# Altium PCB PCB1.PcbDoc
Units mil, origin at the board's own origin, x right, y up, seen from the top; angles counter-clockwise.
Board outline 1377.95 x 629.92 mil, 2 copper layers (Top Layer, Bottom Layer), stack 65.792 mil thick; 2 components, 19 nets, 46 pads, 0 vias.
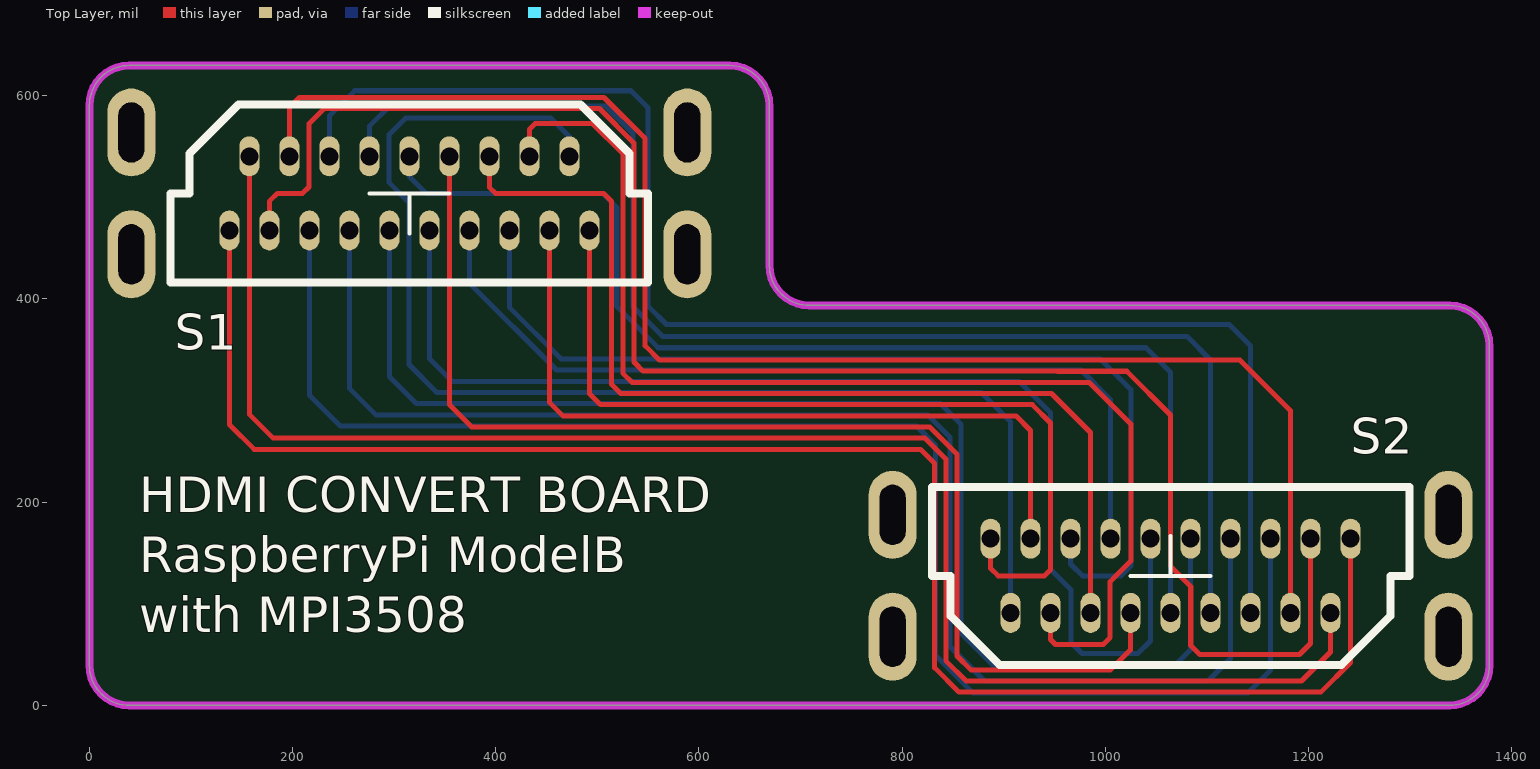
[diagram p0: Top Layer view]
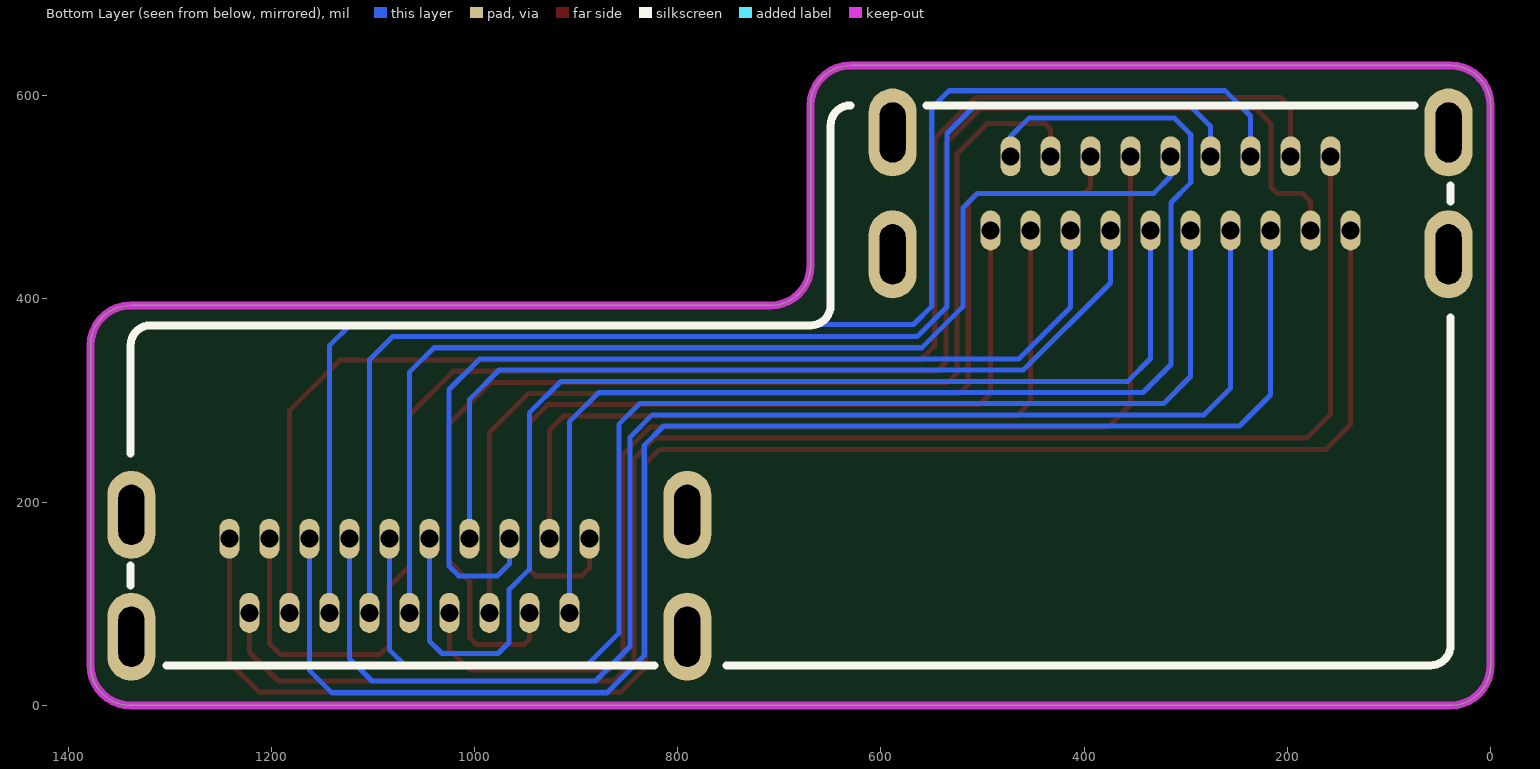
[diagram p1: Bottom Layer view, seen from below]

## Layer stack, top to bottom
Top Layer: signal copper 1.4
Dielectric: core 62.9921, FR-4, Dk 4.8
Bottom Layer: signal copper 1.4

## Board outline
0,39.37 0,590.55 cw(c39.37,590.55) 39.37,629.92 629.92,629.92 cw(c629.92,590.55) 669.29,590.55 669.29,433.07 ccw(c708.66,433.07) 708.66,393.7 1338.58,393.7 cw(c1338.58,354.33) 1377.95,354.33 1377.95,39.37 cw(c1338.58,39.37) 1338.58,0 39.37,0 cw(c39.37,39.37)

## Design rules (kind name [scope] priority, off if disabled: settings)
Clearance [All] p1: gap=6
HoleSize [All] p1: absolutevalues=TRUE maxlimit=100 minlimit=5 maxpercent=80.000 minpercent=20.000
HoleToHoleClearance [All] p1: gap=7.87 allowstackedmicrovias=TRUE
MinimumSolderMaskSliver [All] p1: minsoldermaskwidth=5
PolygonConnect [All] p1: connectstyle=Relief reliefconductorwidth=10 reliefentries=4 polygonreliefangle="90 Angle"
RoutingCorners [All] p1: cornerstyle=Round minsetback=5 maxsetback=100
RoutingPriority [All] p1: routingpriority=1
RoutingTopology [All] p1: topology=Starburst
RoutingVias [All] p1: holewidth=11.81 width=23.62 viastyle="Through Hole" minholewidth=11.81 minwidth=23.62 maxholewidth=59.06 maxwidth=78.74
SilkToSilkClearance [All] p1: silktosilkclearance=5
SilkscreenOverComponentPads [All] p1: minsilkscreentomaskgap=5
SolderMaskExpansion [All] p1: expansion=4
Width [All] p1: maxlimit=10 minlimit=5 preferedwidth=5
20 further rules are at their usual default settings.

## Components (designator, comment, footprint, x,y, rotation, side; value= is the part's Value field where it differs from the comment)
S1 "HDMI" "HDMI PLUG" 314.96,503.94 r0 top locked
S2 "HDMI" "HDMI PLUG" 1064.17,127.56 r180 top locked

## Footprints (in the part's own frame and the unit in brackets; to place one, negate y for a bottom-side part, rotate by r counter-clockwise, add the part's x,y. Pads: shape width x height; smd on the part's side, far side on the other; paste and mask are expansions set on the pad)
"HDMI PLUG" [mm]
  oval 1.2x2.2 hole 0.65 slot 1.5 at 90 deg: 0(-6.949,-1.524) 0(-6.949,1.524) 0(6.949,-1.524) 0(6.949,1.524)
  oval 0.5x1 hole 0.45: 1(4.5,-0.927) 2(4,0.927) 3(3.5,-0.927) 4(3,0.927) 5(2.5,-0.927) 6(2,0.927) 7(1.5,-0.927) 8(1,0.927) 9(0.5,-0.927) 10(0,0.927) 11(-0.5,-0.927) 12(-1,0.927) 13(-1.5,-0.927) 14(-2,0.927) 15(-2.5,-0.927) 16(-3,0.927) 17(-3.5,-0.927) 18(-4,0.927) 19(-4.5,-0.927)
  silkscreen extent -5.97,-2.22 5.97,2.23, body extent -6.95,-2.23 6.95,2.22, height 12.81

## Nets (pads, with @x,y where several pads share a name; then routed paths per layer and width w, separated by ;. In a path a pad name is that pad's centre, name@x,y a point inside that pad or via, vN(x,y) a via of type N, cw(c..) or ccw(c..) an arc to the next point about the centre after c; other vN are vias at no path point)
NetS1_1: S1.1 S2.1 | length 864.6
  Top Layer w5: S1.1@492.13,472.44 S1.1 492.13,306.87 503,296 928.08,296 946.08,278 946.08,133.56 940.08,127.56 894.45,127.56 887.01,135 S2.1@887.01,159.06
NetS1_2: S1.2 S2.2 | length 1249.2
  Bottom Layer w5: S1.2@472.44,535.43 S1.2 472.44,560 454.44,578 311.08,578 295.08,562 295.08,514.51 314.59,495 314.59,335.41 342,308 877.83,308 906.69,279.14 S2.2@906.69,96.06
NetS1_3: S1.3 S2.3 | length 770.8
  Top Layer w5: S1.3@452.76,472.44 S1.3 452.76,298.24 466,285 912,285 926.38,270.62 S2.3 S2.3@926.38,159.06
NetS1_4: S1.4 S2.4 | length 1188.2
  Top Layer w5: S1.4@433.07,535.43 S1.4 433.07,566.93 438.82,572.68 495.32,572.68 525.08,542.92 525.08,326.92 534,318 948.08,318 948.16,317.92 984.08,317.92 1025.08,276.92 1025.08,142.08 1010.08,127.08 1010.08,127 1004.74,121.67 1004.74,66.74 998,60 951,60 946.06,64.94 S2.4 S2.4@946.06,96.06
NetS1_5: S1.5 S2.5 | length 987.5
  Bottom Layer w5: S1.5@413.39,472.44 S1.5 413.39,392 464.39,341 995,341 1025.08,310.92 1025.08,137.08 1015.56,127.56 977.44,127.56 965.75,139.25 S2.5@965.75,159.06
NetS1_6: S1.6 S2.6 | length 995.1
  Top Layer w5: S1.6@393.7,535.43 393.7,510 399.7,504 506,504 514.08,495.92 514.08,315.92 523,307 943.52,307 943.6,306.92 947.08,306.92 985.43,268.57 S2.6@985.43,96.06
NetS1_7: S1.7 S2.7 | length 877.2
  Bottom Layer w5: S1.7@374.02,472.44 S1.7 374.02,415.81 459.83,330 976,330 1005.12,300.88 S2.7 S2.7@1005.12,159.06
NetS1_8: S1.8 S2.8 | length 1183.8
  Top Layer w5: S1.8@354.33,535.43 354.33,296.06 376.39,274 827.11,274 854,247.11 854,48.56 867.56,35 1005,35 1024.8,54.8 S2.8 S2.8@1024.8,96.06
NetS1_9: S1.9 S2.9 | length 1182.6
  Bottom Layer w5: S1.9@334.65,472.44 S1.9 334.65,341.35 357,319 915,319 946.08,287.92 946.08,133.92 966.12,113.88 966.12,61.88 977,51 1032,51 1044.49,63.49 S2.9@1044.49,159.06
NetS1_10: S1.10 S2.10 | length 1137.7
  Bottom Layer w5: S1.10@314.96,535.43 314.96,520.47 331.43,504 505.08,504 519.08,490 519.08,392.92 520,392 520,391.83 559.83,352 1040,352 1064.17,327.83 S2.10
NetS1_11: S1.11 S2.11 | length 1286.5
  Bottom Layer w5: S1.11@295.28,472.44 S1.11 295.28,323.72 322,297 837.65,297 858,276.65 858,71 890,39 1068,39 1083.86,54.86 S2.11@1083.86,159.06
NetS1_12: S1.12 S2.12 | length 1318.2
  Bottom Layer w5: S1.12@275.59,535.43 S1.12 275.59,570 295.59,590 508,590 535,563 535,392.38 564.38,363 1080.54,363 1103.54,340 S2.12@1103.54,96.06
NetS1_13: S1.13 S2.13 | length 1389.7
  Bottom Layer w5: S1.13@255.91,472.44 S1.13 255.91,312.09 282,286 825.02,286 847,264.02 847,58 881,24 1101,24 1123.23,46.23 S2.13@1123.23,159.06
NetS1_14: S1.14 S2.14 | length 1437.8
  Bottom Layer w5: S1.14@236.22,535.43 S1.14 236.22,580 261.22,605 533.07,605 550,588.07 550,392.94 567.94,375 1121.85,375 1142.91,353.94 S2.14@1142.91,96.06
NetS1_15: S1.15 S2.15 | length 1489.3
  Bottom Layer w5: S1.15@216.53,472.44 S1.15 216.53,305.47 247,275 814,275 833,256 833,49 869.56,12.44 1140.44,12.44 1162.6,34.6 S2.15@1162.6,159.06
NetS1_16: S1.16 S2.16 | length 1483.8
  Top Layer w5: S1.16@196.85,535.43 S1.16 196.85,588.58 206.69,598.43 506.56,598.43 547.08,557.9 547.08,353.92 561,340 1132.28,340 1182.28,290 S2.16@1182.28,96.06
NetS1_17: S1.17 S2.17 | length 1695.4
  Top Layer w5: S1.17@177.16,472.44 177.16,496.09 185.08,504 209.84,504 216.16,510.32 216.16,572.46 231.13,587.43 502,587.43 536.08,553.35 536.08,337.92 545,329 952.63,329 952.71,328.92 1021.08,328.92 1064.08,285.92 1064.08,137 1084.08,117 1084.08,58.92 1093,50 1191,50 1201.97,60.97 S2.17@1201.97,159.06
NetS1_18: S1.18 S2.18 | length 1593.4
  Top Layer w5: S1.18@157.48,535.43 157.48,286.52 181,263 822.56,263 843,242.56 843,44 863,24 1193,24 1221.65,52.65 S2.18 S2.18@1221.65,96.06
NetS1_19: S1.19 S2.19 | length 1655.3
  Top Layer w5: S1.19@137.79,472.44 S1.19 137.79,276.38 162.17,252 818,252 832,238 832,37 856,13 1212,13 1241.34,42.34 S2.19@1241.34,159.06
pads on no net: S1.0 S2.0

## Keep-outs
Keep-Out Layer:
  the board outline again, w7.87

## Silkscreen, mask and mechanical layers (free items; w line width, h text height)
Top Overlay:
  text "HDMI CONVERT BOARD" at 49.06,189.91 h35
  text "RaspberryPi ModelB" at 49.06,130.85 h35
  text "with MPI3508" at 49.06,71.8 h35
Bottom Overlay:
  lines w7.87: 39.37,381.89 39.37,59.06 ccw(c59.06,59.06) 59.06,39.37 751.97,39.37 ; 39.37,496.06 39.37,511.81 ; 74.8,590.55 555.12,590.55 ; 629.92,590.55 cw(c629.92,570.87) 649.61,570.87 649.61,393.7 ccw(c669.29,393.7) 669.29,374.02 1318.9,374.02 cw(c1318.9,354.33) 1338.58,354.33 1338.58,248.03 ; 822.83,39.37 1303.15,39.37 ; 1338.58,118.11 1338.58,137.8